# Altium PCB motor_crash_detection_pcb.PcbDoc
Units mil, origin at the board's own origin, x right, y up, seen from the top; angles counter-clockwise.
Board outline 6000 x 4000 mil, 2 copper layers (Top Layer, Bottom Layer); 21 components, 23 nets, 49 pads, 0 vias.
Unrouted connection lines stored in the file: 29.
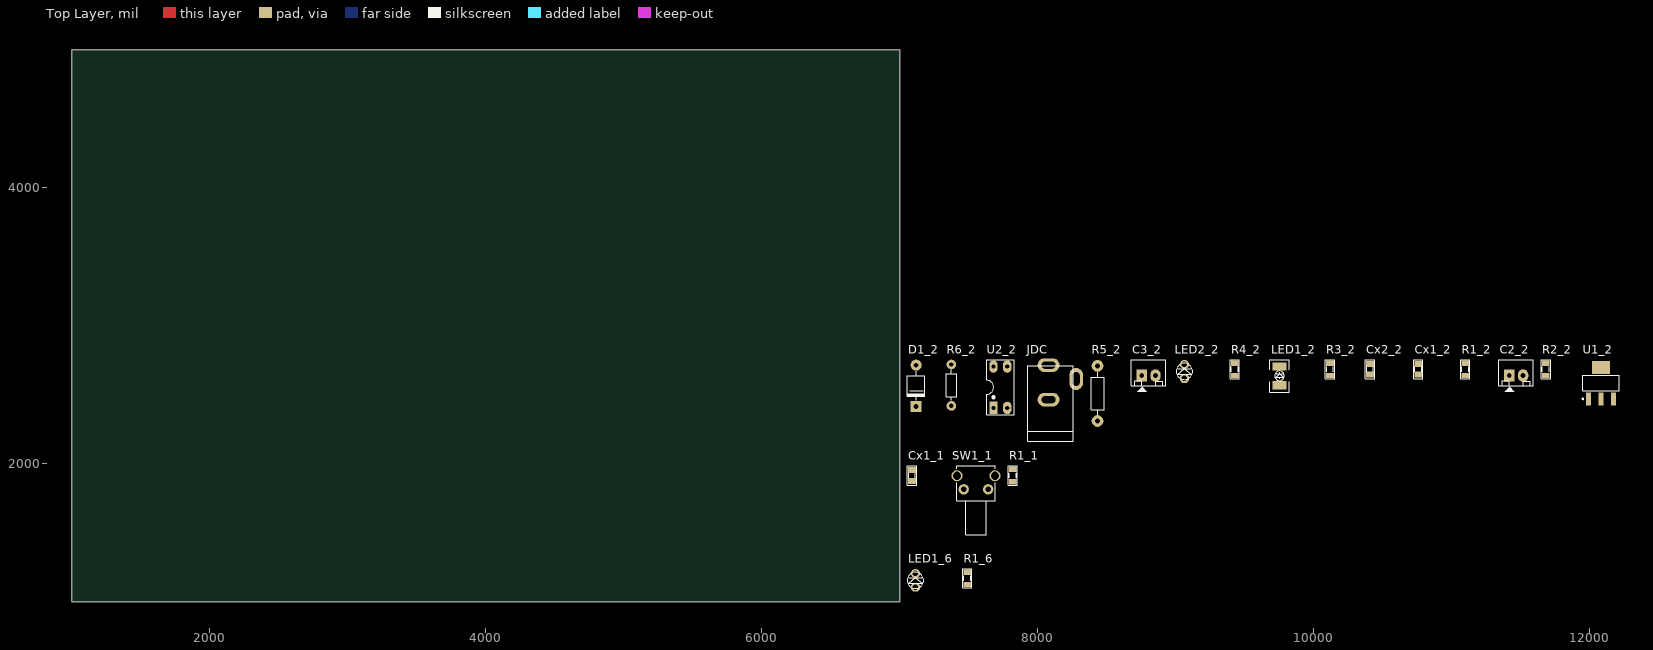
[diagram p0: Top Layer view]
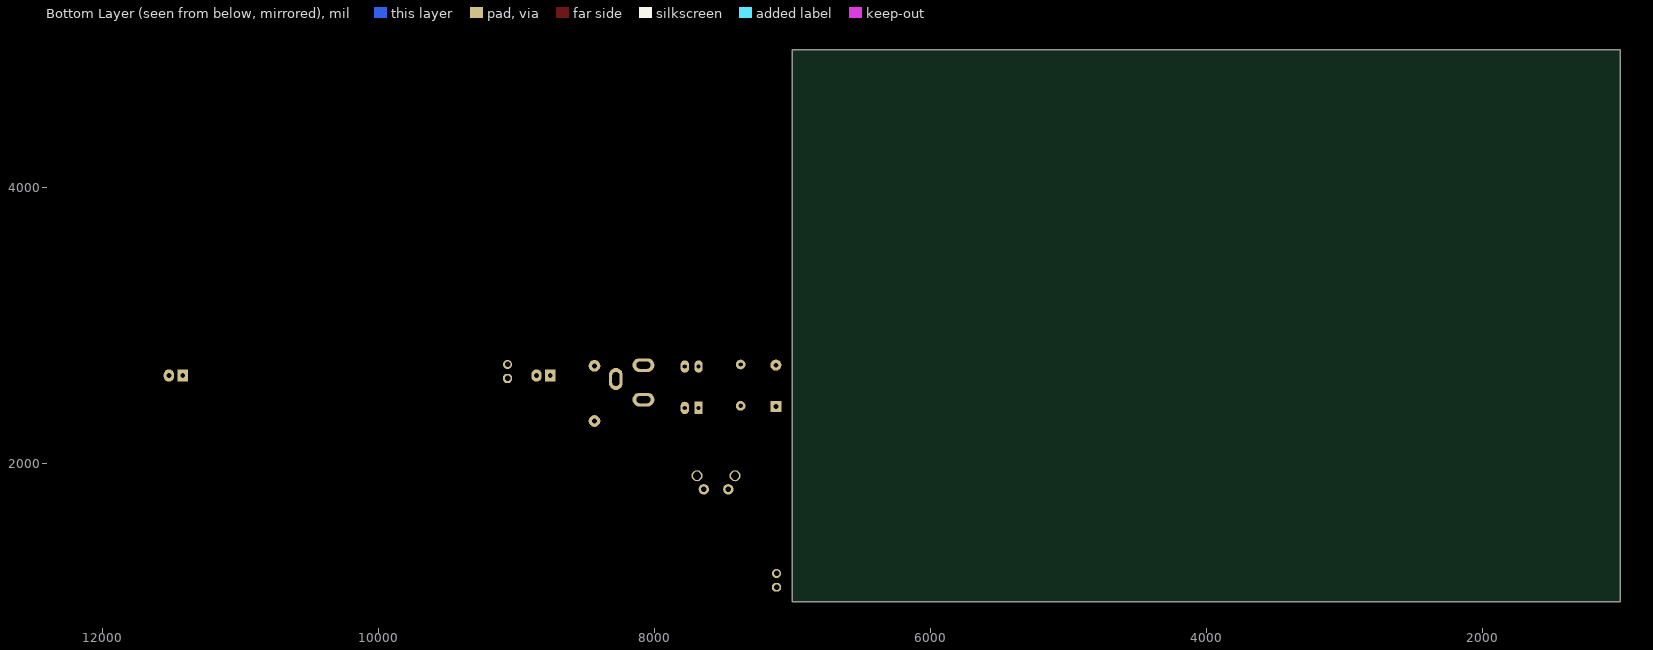
[diagram p1: Bottom Layer view, seen from below]

## Layer stack, top to bottom
Top Solder: solder mask 0.4, Solder Resist, Dk 3.5
Top Layer: signal copper 1.4
Dielectric 1: dielectric 12.6, FR-4, Dk 4.8
Bottom Layer: signal copper 1.4
Bottom Solder: solder mask 0.4, Solder Resist, Dk 3.5

## Board outline
1000,1000 7000,1000 7000,5000 1000,5000

## Design rules (kind name [scope] priority, off if disabled: settings)
Clearance [All] p1: gap=10 ignorepadtopadclearanceinfootprint=FALSE except(0: Arc-Hole Track-Hole SMDPad-Hole THPad-Hole Via-Hole Fill-Hole Poly-Hole Region-Hole Text-Hole)
PolygonConnect [All] p1: connectstyle=Relief reliefconductorwidth=10 reliefentries=4 polygonreliefangle="90 Angle" airgapwidth=10
RoomDefinition Designator_2 [InComponentClass('Designator')] p1: confinementstyle=ConfineIn formatcopy=TRUE lockcomponents=FALSE outline 7045,2155 12235,2155 12235,2875 7045,2875
RoomDefinition Designator_1 [InComponentClass('Designator')] p2: confinementstyle=ConfineIn formatcopy=TRUE lockcomponents=FALSE outline 7045,2155 12235,2155 12235,2875 7045,2875
RoomDefinition Designator [InComponentClass('Designator')] p3: confinementstyle=ConfineIn formatcopy=TRUE lockcomponents=FALSE outline 7045,2155 12235,2155 12235,2875 7045,2875
RoutingVias [All] p1: holewidth=28 width=50 viastyle="Through Hole" minholewidth=28 minwidth=50 maxholewidth=28 maxwidth=50
SolderMaskExpansion [All] p1: expansion=4 istentingtop=FALSE
Width [All] p1: maxlimit=10 minlimit=10 preferedwidth=10
30 further rules are at their usual default settings.

## Classes and differential pairs
component class Designator: C1_2 C2_2 C3_2 Cx1_2 Cx2_2 D1_2 JDC LED1_2 LED2_2 R1_2 R2_2 R3_2 R4_2 R5_2 R6_2 U1_2 U2_2

## Components (designator, comment, footprint, x,y, rotation, side; value= is the part's Value field where it differs from the comment)
C2_2 "PIN_HEADER" Header2 11420,2640 r0 top
C3_2 "Header2" Header2 8755,2640 r0 top
Cx1_1 "100nF" CN-SMD-0805 7090,1915 r90 top value=33pF
Cx1_2 "100nF" CN-SMD-0805 10760,2685 r90 top value=33pF
Cx2_2 "100nF" CN-SMD-0805 10410,2685 r90 top value=33pF
D1_2 "Diode" DIO-1A-SMALL 7120,2765 r90 top value=1N5007
JDC "DCIN-12V" DC0 8180,2590 r90 top value="Jac DC"
LED1_2 "LED" LED-GREEN-0805 9755,2570 r90 top value="LED 3 - 5 ly 2 Colour"
LED1_6 "LED" LED-3MM-GREEN 7115,1105 r90 top value="LED 3 ly Single Colour"
LED2_2 "LED" LED-3MM-RED 9065,2620 r90 top value="LED 3 ly Single Colour"
R1_1 "10k" RES-SMD-0805 7820,1915 r90 top
R1_2 "10k" RES-SMD-0805 11100,2685 r90 top
R1_6 "220" RES-SMD-0805 7490,1170 r90 top
R2_2 "1k" RES-SMD-0805 11685,2685 r90 top
R3_2 "1k" RES-SMD-0805 10120,2685 r90 top
R4_2 "2k" RES-SMD-0805 9430,2685 r90 top
R5_2 "10k" RES-1/4W 8440,2525 r90 top
R6_2 "10k" RES-1/8W 7375,2565 r90 top
SW1_1 "SW" SW1-DIP 7465,1815 r0 top value="SW chip 2 pin"
U1_2 "LM1117-3.3V" SOT223 12085,2585 r0 top
U2_2 "PC817" DIP4 7680,2405 r0 top

## Footprints (in the part's own frame and the unit in brackets; to place one, negate y for a bottom-side part, rotate by r counter-clockwise, add the part's x,y. Pads: shape width x height; smd on the part's side, far side on the other; paste and mask are expansions set on the pad)
CN-SMD-0805 [mil]
  rect 43.31x55 smd: 1(-39.36,0.01) 2(39.37,0.01)
  silkscreen extent -70,-34 70,33, body extent -39,-25 39,25, height 31
DC0 [mil] "Jac DC input"
  oval 100x160 hole 50 slot 100 at 90 deg: 1(125,100) 2(-125,100)
  oval 160x100 hole 50 slot 100 at 0 deg: 3(25,-100)
  silkscreen extent -425,-80 120,250, body extent -410,-105 134,269, height 434
DIO-1A-SMALL [mil] "Diode 1A, W 100mil, L 350mil"
  round 80 hole 35: 1(-50,0)
  rect 80x80 hole 35: 2(-350,0)
  silkscreen extent -305,-61 -95,65, body extent -366,-61 -34,65, height 122
DIP4 [mil]
  rect 60x90 hole 31: 1(0,0)
  oval 60x90 hole 31: 2(100,0) 3(100,300) 4(0,300)
  silkscreen extent -50,-50 150,350, body extent -59,-10 159,305, height 170
Header2 [mil] "CON2"
  rect 75x90 hole 34: 1(0,0)
  oval 75x90 hole 34: 2(100,0)
  silkscreen extent -75,-118 175,115, body extent -68,-70 168,107, height 236
LED-3MM-GREEN [mil]
  oct 65x65 hole 40: 1(0,0)
  round 65 hole 40: 2(100,0)
  silkscreen extent -9,-59 109,59, body extent -15,-70 112,60, height 182
LED-3MM-RED [mil]
  oct 65x65 hole 40: 1(0,0)
  round 65 hole 40: 2(100,0)
  silkscreen extent -9,-59 109,59, body extent -27,-77 117,80, height 181
LED-GREEN-0805 [mil]
  rect 60x100 smd: 1(0,0) 2(135,0)
  silkscreen extent -50,-70 185,70, body extent -20,-60 154,60, height 75
RES-1/4W [mil]
  round 85 hole 35: 1(-215,5) 2(185,5)
  silkscreen extent -173,-42 141,52, body extent -227,-42 197,52, height 95
RES-1/8W [mil]
  round 70 hole 31: 1(-145,0) 2(155,0)
  silkscreen extent -105,-38 115,38, body extent -154,-40 164,39, height 79
RES-SMD-0805 [mil]
  rect 39.37x55 smd: 1(-45,0) 2(45,0)
  silkscreen extent -70,-34 70,33, body extent -39,-25 39,25, height 31
SOT223 [mm]
  rect 1x2.4 smd: 1(-2.3,-2.9) 2(0,-2.9) 3(2.3,-2.9)
  rect 3.3x2.4 smd: 4(0,2.9)
  silkscreen extent -3.47,-3.02 3.35,1.4, body extent -3.25,-3.56 3.25,3.4, height 1.68
SW1-DIP [mil]
  round 75 hole 40: 1(0,0) 2(177.16,0)
  round 80 hole 60: ""(-49.21,98.42) ""(226.38,98.42)
  silkscreen extent -51,-331 228,171, body extent -87,-398 265,160, height 283

## Part data
C2_2: library part Header2, "Header IDC, 2 x 1 Pin Vertical 2.54mm Pitch (Non-Boxed, Male)", Manufacturer="W¨¹rth Elektronik eiSos GmbH", partNo=613002143121, ComponentLink1 Description=Manufacturer, ComponentLink1URL=http://www.we-online.com, ComponentLink2 Description=Datasheet, ComponentLink2URL=http://katalog.we-online.de/em/datasheet/6130xx143121.pdf, Created by="Karrer Zheng", Created Date="29 March 2013", NoPins=02
C3_2: "Header IDC, 2 x 1 Pin Vertical 2.54mm Pitch (Non-Boxed, Male)", Manufacturer="W¨¹rth Elektronik eiSos GmbH", partNo=613002143121, ComponentLink1 Description=Manufacturer, ComponentLink1URL=http://www.we-online.com, ComponentLink2 Description=Datasheet, ComponentLink2URL=http://katalog.we-online.de/em/datasheet/6130xx143121.pdf, Created by="Karrer Zheng", Created Date="29 March 2013", NoPins=02
Cx1_1 Cx1_2 Cx2_2: library part CN
D1_2: "Default Diode", Code - JEDEC=DO-214-AB, Published=8-Jun-2000, Publisher="Altium Limited", Revision="July-2002: Re-released for DXP Platform."
JDC: library part DCIN, "Jac DC input"
LED1_2: library part "LED SMD"
LED1_6 LED2_2: "LED Single colour Green and Red"
R1_1 R1_2 R1_6 R2_2 R3_2 R4_2: library part Res-SMD, "Resistor", Manufacturer="Generic Components", Class=Passive, Published=08/06/2000, Publisher="Altium Hobart Technology Centre"
R5_2 R6_2: library part Res, "Res", Manufacturer="Generic Components", Class=Passive, Published=08/06/2000, Publisher="Altium Hobart Technology Centre", SubClass=R
SW1_1: library part SW2, "Switch button 2 pin"
U1_2: library part LM1117, "800mA Low-Dropout Linear Regulator", Creator="Nguyen Ba Bien", Website=http://group3i.net
U2_2: "Single Opto"

## Nets (pads, with @x,y where several pads share a name; then routed paths per layer and width w, separated by ;. In a path a pad name is that pad's centre, name@x,y a point inside that pad or via, vN(x,y) a via of type N, cw(c..) or ccw(c..) an arc to the next point about the centre after c; other vN are vias at no path point)
3v3: R5_2.1
+3.3VDC: Cx2_2.2 R1_1.1 R2_2.2 U1_2.2
+5V: R1_6.2
+5VDC: C2_2.1 Cx1_2.2 R1_2.1 R3_2.2 U1_2.3
DCIN_12V: C3_2.1 D1_2.1 JDC.1
DCIN_GND: C3_2.2 JDC.2 JDC.3
ESP_RST: Cx1_1.2 R1_1.2 SW1_1.2
GND: C2_2.2 Cx1_1.1 Cx1_2.1 Cx2_2.1 LED1_2.2 LED2_2.2 R4_2.2 SW1_1.1 U1_2.1 U2_2.3
GND_POWER: U2_2.2
NetD1_2_2: D1_2.2 R6_2.2
NetESP1_1_3: 
NetESP1_1_4: 
NetESP1_1_6: 
NetESP1_1_7: 
NetESP1_1_11: 
NetESP1_1_14: 
NetESP1_1_20: R1_2.2 R4_2.1
NetESP1_1_26: LED1_6.2
NetLED1_2_1: LED1_2.1 R2_2.1
NetLED1_6_1: LED1_6.1 R1_6.1
NetLED2_2_1: LED2_2.1 R3_2.1
NetR5_2_2: R5_2.2 U2_2.4
NetR6_2_1: R6_2.1 U2_2.1
pads on no net: SW1_1. U1_2.4